# EAGLE board DIBS_4-7-20 (EAGLE 9.5.2)
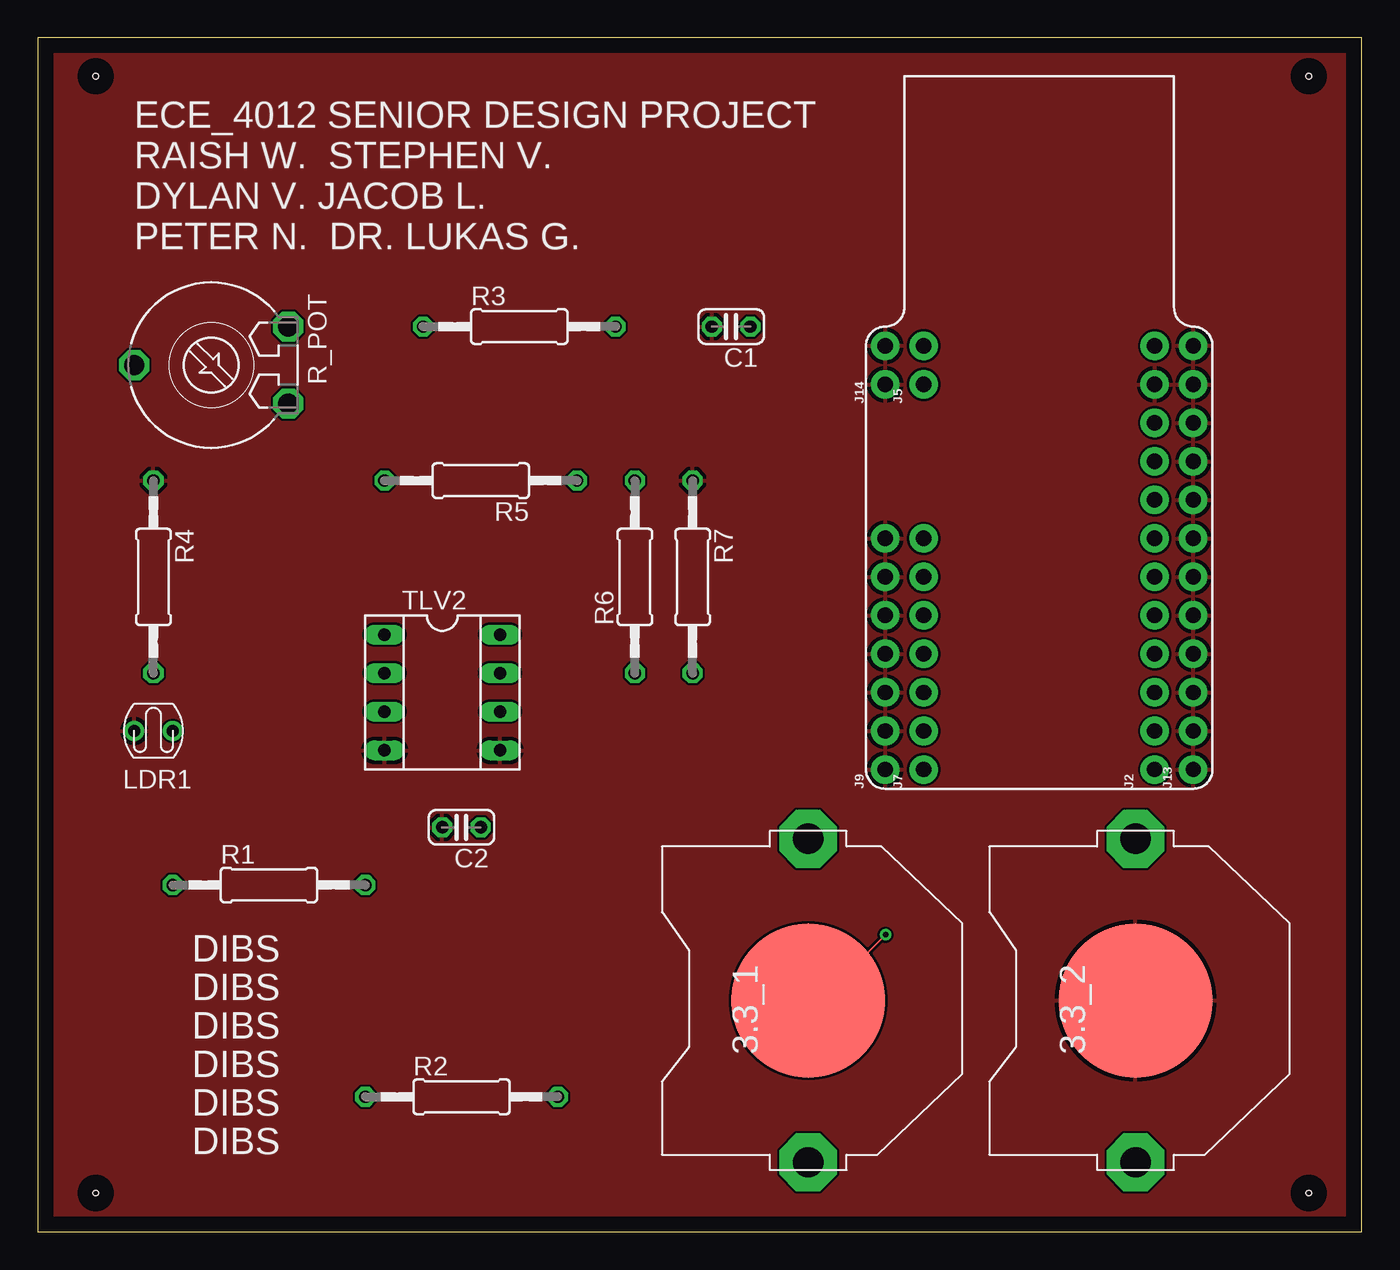
[diagram p0: board, top side]
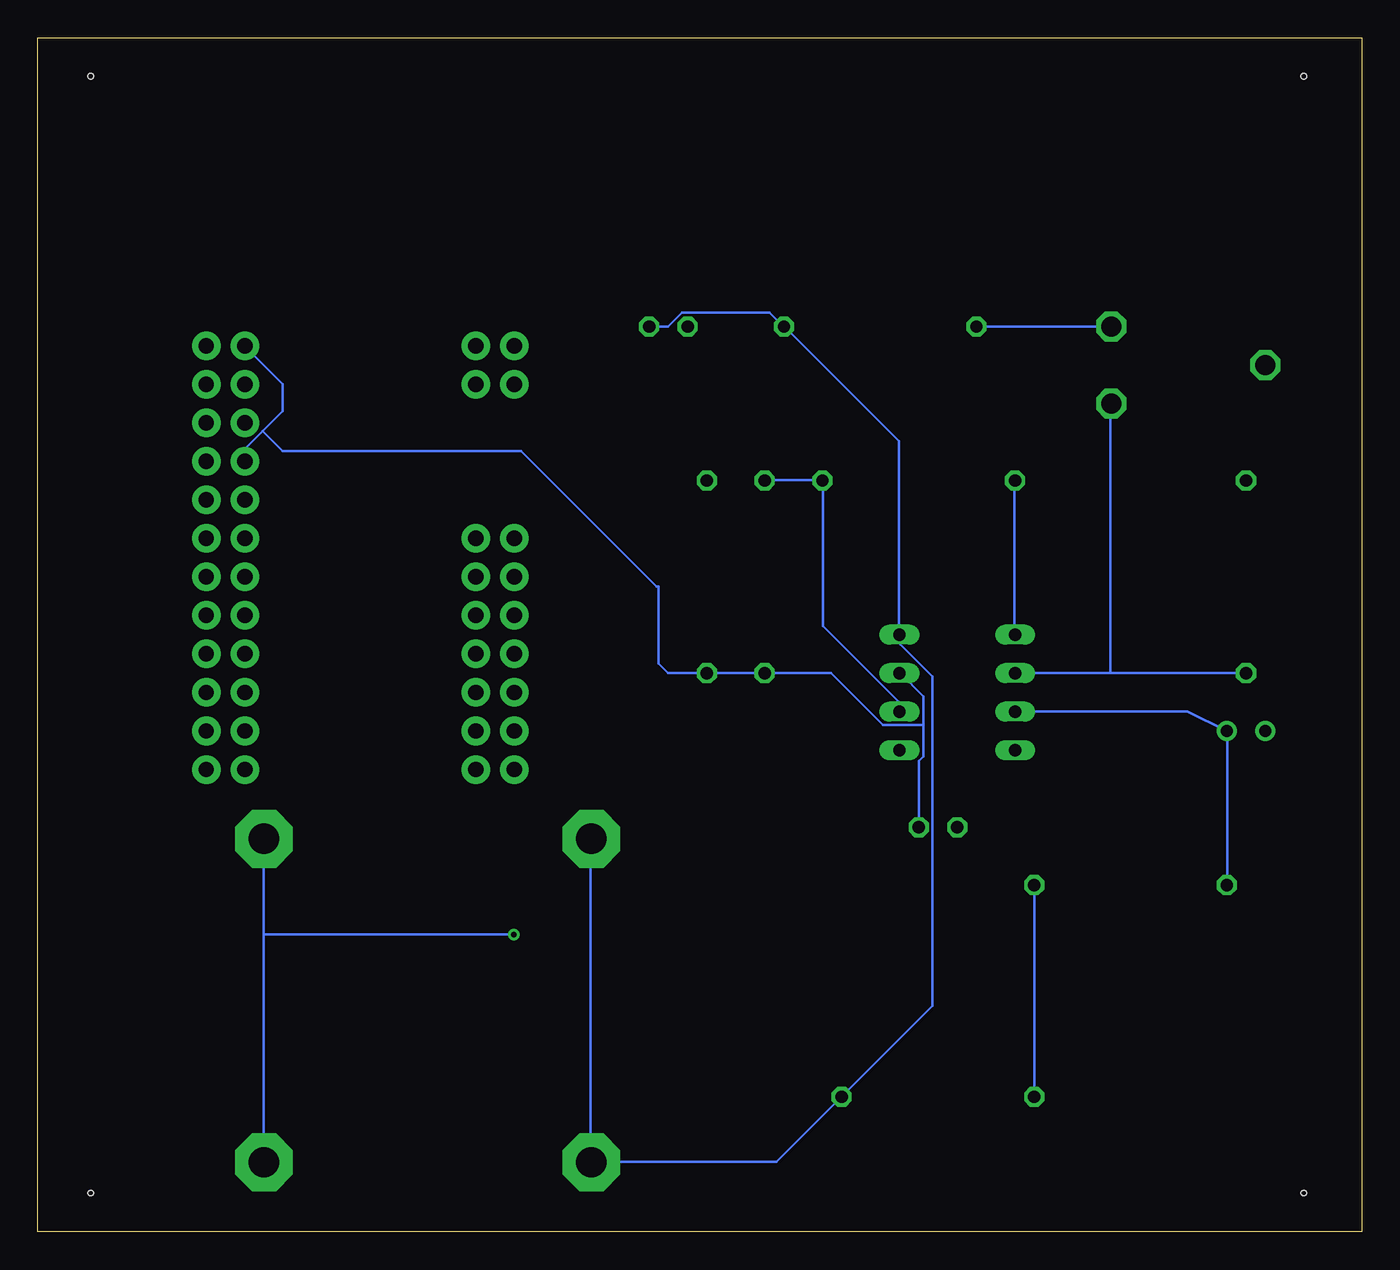
[diagram p1: board, bottom side, seen from below]

Size 87.3 x 78.73 mm. Coordinates in mm from the lower left corner, seen from the top.
Outline: 0,0 87.3,0 87.3,78.73 0,78.73 0,0
Copper layers (1*16): Top 0.035mm / dielectric 1.5mm / Bottom 0.035mm
Design rules "default": minimum track width 6mil, minimum drill 0.35mm, track to track 6mil, track to pad 6mil, pad to pad 6mil, via to via 6mil, smd to smd 6mil, copper to edge 40mil, drill to drill 6mil, minimum pad ring 10mil, minimum via ring 8mil, stop-mask expansion 4mil, vias tented up to drill 0mil, thermal gap 10mil
Net classes: 1 vcc: width 0 mm
Holes 0.35 mm at 3.81,76.2 3.81,2.54 83.82,2.54 83.82,76.2

## Footprints (pad centres in the part's own frame; a part is rotated, then mirrored left to right if it is on the bottom)
CR2032-THRU = drill 2 pad 3.81 octagon: +1 -10.668,0; +2 10.668,0 | smd 10.16 x 10.16: - 0,0
C025-024X044 = drill 0.813 octagon: 1 -1.27,0; 2 1.27,0
1X12_NO_SILK = drill 1.016 pad 1.88: 1 0,0; 2 2.54,0; 3 5.08,0; 4 7.62,0; 5 10.16,0; 6 12.7,0; 7 15.24,0; 8 17.78,0; 9 20.32,0; 10 22.86,0; 11 25.4,0; 12 27.94,0
1X02_NO_SILK = drill 1.016 pad 1.88: 1 0,0; 2 2.54,0
1X07_NO_SILK = drill 1.016 pad 1.88: 1 0,0; 2 2.54,0; 3 5.08,0; 4 7.62,0; 5 10.16,0; 6 12.7,0; 7 15.24,0
LDR3MM = drill 0.8: P$1 0,0; P$2 2.54,0
0207/12 = drill 0.813 octagon: 1 -6.35,0; 2 6.35,0
LI10 = drill 1.321 octagon: A -2.54,-5.08; E 2.54,-5.08; S 0,5.08
SOCKET-08 = drill 0.813 long: 1 -3.81,-3.81; 2 -1.27,-3.81; 3 1.27,-3.81; 4 3.81,-3.81; 5 3.81,3.81; 6 1.27,3.81; 7 -1.27,3.81; 8 -3.81,3.81

## Placement (x,y rotation side)
3.3_1  CR2032  [CR2032-THRU]  50.8,15.24 90 top
3.3_2  CR2032  [CR2032-THRU]  72.39,15.24 90 top
C1  100nF  [C025-024X044]  45.72,59.69 180 top
C2  100nF  [C025-024X044]  27.94,26.67 180 top
J2  [1X12_NO_SILK]  73.66,30.48 90 top
J5  [1X02_NO_SILK]  58.42,55.88 90 top
J7  [1X07_NO_SILK]  58.42,30.48 90 top
J9  [1X07_NO_SILK]  55.88,30.48 90 top
J13  [1X12_NO_SILK]  76.2,30.48 90 top
J14  [1X02_NO_SILK]  55.88,55.88 90 top
LDR1  On: 555 Off: 855  [LDR3MM]  8.89,33.02 180 top
R1  1.5K  [0207/12]  15.24,22.86 0 top
R2  11K  [0207/12]  27.94,8.89 0 top
R3  470  [0207/12]  31.75,59.69 0 top
R4  4.7K  [0207/12]  7.62,43.18 270 top
R5  10K  [0207/12]  29.21,49.53 180 top
R6  10K  [0207/12]  39.37,43.18 90 top
R7  470  [0207/12]  43.18,43.18 270 top
R_POT  4.7K  [LI10]  11.43,57.15 90 top
TLV2  Op amps  [SOCKET-08]  26.67,35.56 270 top

## Library data of the parts
3.3_1 3.3_2 = adafruit
C1 C2 = rcl; SPICEPREFIX: C
J2 J5 J7 J9 J13 J14 = SparkFun-Connectors
LDR1 = CEDTv40
R1-R7 = rcl; SPICEPREFIX: R
R_POT = pot
TLV2 = ic-package

## Nets
!RESET: J2.10
GND: 3.3_2.- C1.2 C2.2 J2.11 J9.1 J9.2 J9.3 J9.4 J9.5 J9.6 J9.7 J13.1 J13.2 J13.3 J13.4 J13.5 J13.6 J13.7 J13.8 J13.9 J13.10 J13.11 J13.12 J14.1 J14.2 LDR1.P$2 R4.1 R7.1 TLV2.4 TLV2.5
N$1: R5.2 TLV2.1
N$2: R5.1 R6.2 TLV2.6
N$3: R3.1 R_POT.E
N$5: LDR1.P$1 R1.1 TLV2.3
N$6: 3.3_1.- 3.3_2.+1 3.3_2.+2
N$9: R4.2 R_POT.A TLV2.2
N$11: R1.2 R2.1
P0.02/AIN0: J2.1
P0.03/AIN1: J2.2
P0.04/AIN2: J2.8
P0.05/AIN3: J2.7
P0.09/NFC1: J7.2
P0.10/NFC2: J7.1
P0.15: J5.1
P0.17: J5.2
P0.19: J7.7
P0.20: J7.6
P0.21: J7.5
P0.22: J7.4
P0.23: J7.3
P0.28/AIN4: J2.6
P0.29/AIN5: J2.5
P0.30/AIN6: J2.4
P0.31/AIN7: J2.3
VCC: 3.3_1.+1 3.3_1.+2 C1.1 R2.2 R3.2 TLV2.8
VIN [vcc]: C2.1 J2.9 J2.12 R6.1 R7.2 TLV2.7

## Tracks (layer width: path | path; a pad name or v marks a point on that pad's centre or on a via)
GND
  pour Top: -1.27,80.01 -1.27,-1.27 88.9,-1.27 88.9,80.01
N$1
  Bottom 0.152: TLV2.1 22.89,39.42 22.89,49.48 R5.2
N$2
  Bottom 0.152: TLV2.6 30.5,34.31 30.5,34.92 35.53,39.95 35.53,49.48 R5.1 35.61,49.56 39.32,49.56 R6.2
N$3
  Bottom 0.152: R_POT.E R3.1
N$5
  Bottom 0.152: TLV2.3 22.81,34.31 11.48,34.31 LDR1.P$1 8.86,33.02 8.86,22.89 R1.1
N$6  (via drill 0.35)
  Top 0.152: v55.91,19.58 51.31,14.99 3.3_1.-
  Bottom 0.152: 72.41,19.61 72.41,25.86 3.3_2.+2 | 72.41,19.61 72.41,4.6 3.3_2.+1 | 72.41,19.61 55.96,19.61 v55.91,19.58
N$9
  Bottom 0.152: TLV2.2 16.56,36.83 | 16.56,36.83 R4.2 | 16.56,36.83 16.56,54.58 R_POT.A
N$11
  Bottom 0.152: R1.2 R2.1
VCC
  Bottom 0.152: C1.1 45.75,59.69 44.83,60.6 39.04,60.6 38.12,59.69 R3.2 38.05,59.69 30.5,52.15 30.5,39.42 TLV2.8 30.43,39.34 30.43,38.73 28.3,36.6 28.3,14.88 R2.2 38.58,4.6 50.77,4.6 3.3_1.+1 50.85,4.6 50.85,25.86 3.3_1.+2
VIN
  Bottom 0.152: C2.1 29.21,31.04 28.9,31.34 28.9,33.4 | 28.9,33.4 28.9,35.31 30.43,36.83 TLV2.7 | 28.9,33.4 31.57,33.4 35,36.83 R6.1 R7.2 45.75,36.83 46.37,37.46 46.37,42.54 46.43,42.55 46.51,42.55 55.45,51.49 71.17,51.49 72.48,52.79 | J2.9 73.66,51.61 72.48,52.79 | 72.48,52.79 71.17,54.1 71.17,55.91 73.66,58.39 J2.12

## Text on the board
tPlace: ECE_4012 SENIOR DESIGN PROJECT / RAISH W. STEPHEN V. / DYLAN V. JACOB L. / PETER N. DR. LUKAS G. | DIBS | DIBS | DIBS | DIBS | DIBS | DIBS